# Altium PCB PCB_Display_2021-08-04.pcbdoc
Units mil, origin at the board's own origin, x right, y up, seen from the top; angles counter-clockwise.
Board outline 4077.43 x 3148.62 mil, 2 copper layers (Top Layer, Bottom Layer); 20 components, 19 nets, 73 pads, 2 vias.
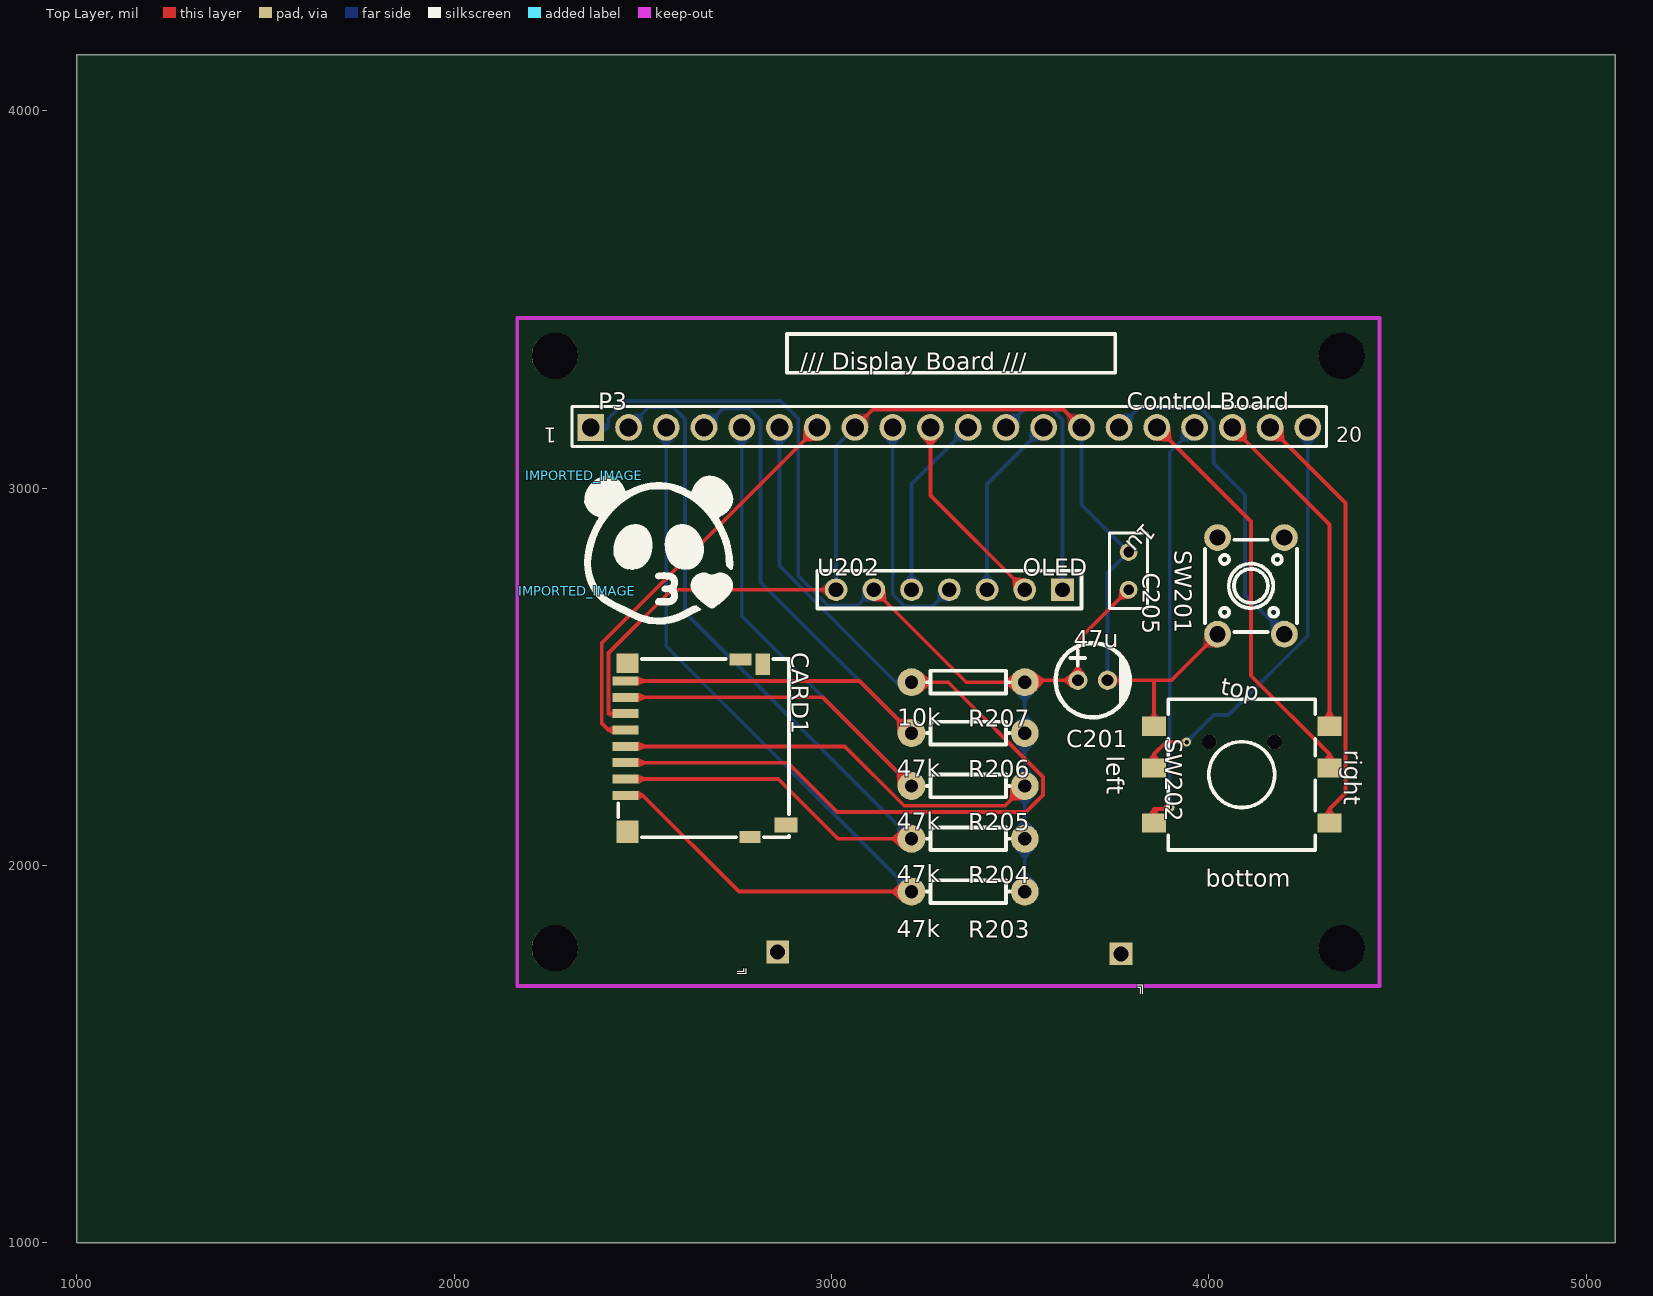
[diagram p0: Top Layer view]
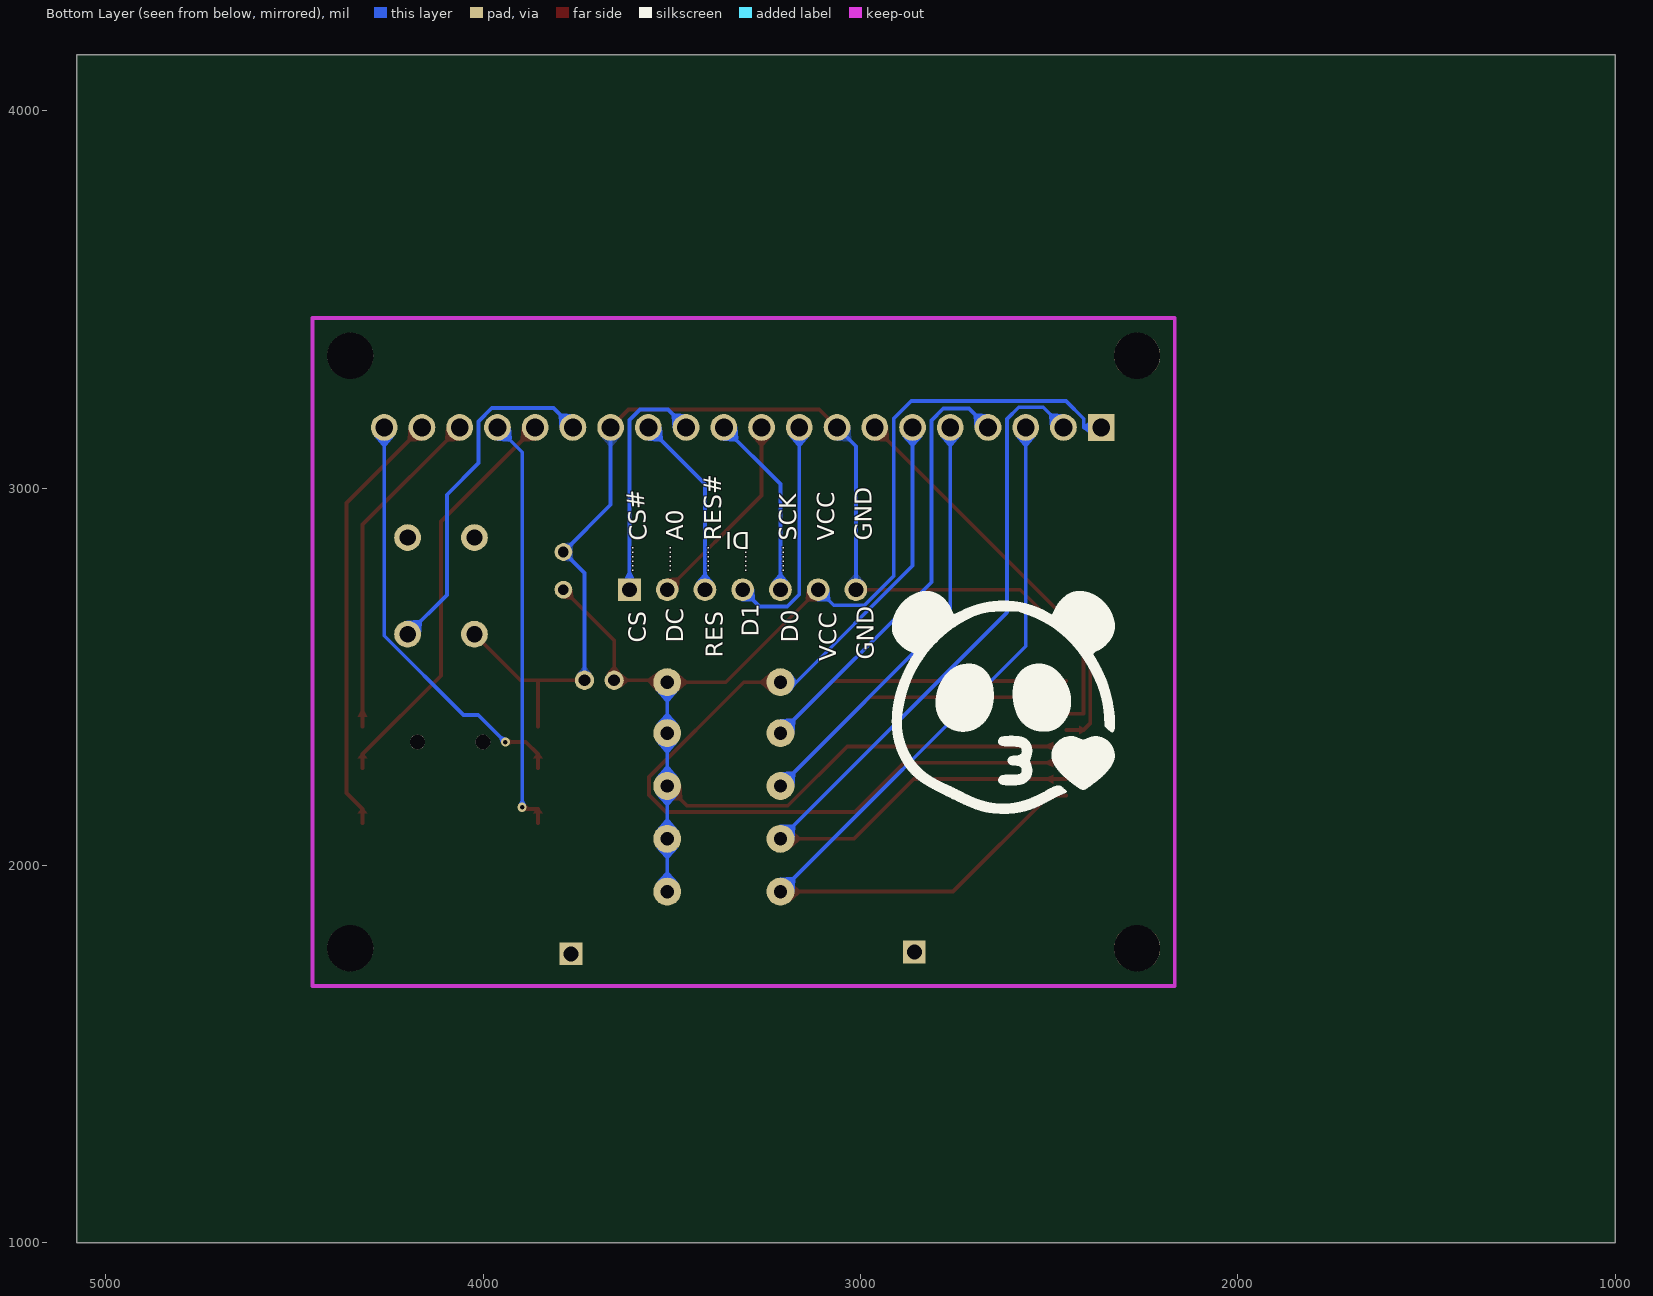
[diagram p1: Bottom Layer view, seen from below]

## Layer stack, top to bottom
Top Layer: signal copper (thickness not stored)
Dielectric: dielectric 12.6, FR-4, Dk 4.8
Bottom Layer: signal copper (thickness not stored)

## Board outline
5077.43,1000 1000,1000 1000,4148.62 5077.43,4148.62

## Components (designator, comment, footprint, x,y, rotation, side; value= is the part's Value field where it differs from the comment)
C201 "47u" CAP-TH_BD5.0-P2.00-D0.8-FD 3692.43,2490.72 r0 top
C205 "1u" RAD-0.1 3787.43,2780.72 r270 top
CARD1 "DM3D-SF" TF-SMD_DM3D-SF 2667.43,2310.72 r270 top
IMPORTED_IMAGE "IMPORTED_IMAGE" IMPORTED_IMAGE 2326.3,2726.86 r0 top
IMPORTED_IMAGE "IMPORTED_IMAGE" IMPORTED_IMAGE 2345.35,3032.15 r0 top
P3 "Control Board" HDR-TH_20P-P2.54-V 3312.43,3160.72 r0 top
R203 "47k" R_AXIAL-0.3 3362.43,1930.72 r180 top
R204 "47k" R_AXIAL-0.3 3362.43,2070.72 r180 top
R205 "47k" R_AXIAL-0.3 3362.43,2210.72 r180 top
R206 "47k" R_AXIAL-0.3 3362.43,2350.72 r180 top
R207 "10k" R_AXIAL-0.3 3362.43,2485.72 r180 top
SW201 "K2-1839SP-C4SW-02" KEY-TH_4P-L6.2-W6.2-P4.50-LS6.5 4111.83,2740.92 r90 top
SW202 "TSX103G901-250" SW-SMD_TSX103G901-250 4087.43,2240.72 r0 top
U202 "OLED" 7P 3312.43,2730.72 r90 top
? "" ? 3309.93,3548.67 r0 top
? "" ? 1932.21,3305.7 r0 top
? "" ? 2143.09,2615.72 r0 top
? "" ? 2934.93,2118.22 r0 top
? "" ? 2640.62,2252.17 r0 top
? "" ? 3689.93,2116.36 r0 top

## Footprints (in the part's own frame and the unit in brackets; to place one, negate y for a bottom-side part, rotate by r counter-clockwise, add the part's x,y. Pads: shape width x height; smd on the part's side, far side on the other; paste and mask are expansions set on the pad)
7P [mil]
  round 60 hole 39.37: 1(0,300) 2(0,200) 3(0,100) 4(0,0) 5(0,-100) 6(0,-200)
  rect 60x60 hole 39.37: 7(0,-300)
  silkscreen extent -50,-350 50,350
CAP-TH_BD5.0-P2.00-D0.8-FD [mm]
  round 1.3 hole 0.8: 1(-1,0) 2(1,0)
  silkscreen extent -2.5,-2.5 2.5,2.5
HDR-TH_20P-P2.54-V [mm]
  rect 1.8x1.8 hole 1.2: 1(-24.13,0)
  round 1.8 hole 1.2: 2(-21.59,0) 3(-19.05,0) 4(-16.51,0) 5(-13.97,0) 6(-11.43,0) 7(-8.89,0) 8(-6.35,0) 9(-3.81,0) 10(-1.27,0) 11(1.27,0) 12(3.81,0) 13(6.35,0) 14(8.89,0) 15(11.43,0) 16(13.97,0) 17(16.51,0) 18(19.05,0) 19(21.59,0) 20(24.13,0)
  silkscreen extent -25.4,-1.27 25.4,1.4
IMPORTED_IMAGE [mil]
KEY-TH_4P-L6.2-W6.2-P4.50-LS6.5 [mm]
  round 1.8 hole 1.1: 1(-3.251,2.25) 2(3.251,2.25) 3(-3.251,-2.25) 4(3.251,-2.25)
  silkscreen extent -3.1,-3.1 3.1,3.1
R_AXIAL-0.3 [mil]
  round 74 hole 35.4: 1(-150,0) 2(150,0)
  silkscreen extent -110,-30 110,30
RAD-0.1 [mil]
  round 47 hole 28: 1(-50,0) 2(50,0)
  silkscreen extent -100,-50 100,50
SW-SMD_TSX103G901-250 [mm]
  rect 1.6x1.3 smd: 1(-5.9,3.25) 2(-5.9,0.45) 3(-5.9,-3.25) 4(5.9,3.25) 5(5.9,0.45) 6(5.9,-3.25)
  round 1 hole 1 unplated: ""(-2.2,2.2) ""(2.2,2.2)
  silkscreen extent -4.95,-5.08 4.95,5.08
TF-SMD_DM3D-SF [mm]
  rect 0.6x1.75 smd: 1(3.175,-5.4) 2(2.075,-5.4) 3(0.975,-5.4) 4(-0.125,-5.4) 5(-1.225,-5.4) 6(-2.325,-5.4) 7(-3.425,-5.4) 8(-4.525,-5.4)
  rect 1.45x1 smd: 9(-5.65,3.825)
  rect 1x1.55 smd: 10(5.175,5.4)
  rect 0.8x1.5 smd: 11(-5.975,2.325)
  rect 0.8x1.4 smd: 12(5.975,2.975)
  rect 1.5x1.5 smd: 13(5.625,-5.275)
  rect 1.3x1.5 smd: 14(-5.725,-5.275)
  silkscreen extent -6,-5.9 6,5.6
? [mil]

## Free pads (board coordinates)
  rect 60x60 hole 39.37: 1(2857.43,1770.72) 2(3767.43,1765.72)
  round 122.05 hole 122.05 unplated: ""(2267.43,1780.72) ""(2267.43,3350.72) ""(4352.43,1780.72) ""(4352.43,3350.72)

## Via types
v1: diameter 24.02, hole 12.01, Top Layer to Bottom Layer, 2 vias

## Nets (pads, with @x,y where several pads share a name; then routed paths per layer and width w, separated by ;. In a path a pad name is that pad's centre, name@x,y a point inside that pad or via, vN(x,y) a via of type N, cw(c..) or ccw(c..) an arc to the next point about the centre after c; other vN are vias at no path point)
A0: P3.10 U202.6 | length 533.6
  Top Layer w10: P3.10 3262.43,2980.72 U202.6
BOTTOM: P3.19 SW202.6 | length 1148.3
  Top Layer w10: P3.19 4362.29,2960.86 4362.29,2192.01 4319.71,2149.43 ; SW202.6 4319.73,2149.42
CENTER: P3.17 SW202.3 | length 1113.8
  Top Layer w10: SW202.3 3855.13,2149.42 ; 3855.15,2149.43 3891.81,2149.43 v1(3896.71,2154.33)
  Bottom Layer w10: v1(3896.71,2154.33) 3896.71,3095 P3.17
CS#: P3.12 U202.7 | length 631
  Bottom Layer w10: P3.12 3510.13,3208.42 3584.33,3208.42 3612.43,3180.32 U202.7
DI: P3.9 U202.4 | length 624.3
  Bottom Layer w10: P3.9 3162.43,2718.16 3194.49,2686.1 3267.81,2686.1 U202.4
GND: C201.2 C205.1 CARD1.6 P3.8 P3.14 SW201.1 SW202.1 U202.1 | length 3177.6
  Top Layer w10: 2409.32,2402.26 2409.32,2562.84 2577.2,2730.72 U202.1 ; 2409.33,2402.22 CARD1.6@2454.83,2402.22 ; P3.8 3109.78,3208.07 3615.08,3208.07 P3.14 ; C201.2 3855.15,2490.72 ; SW202.1@3855.13,2368.62 3855.13,2405.32 ; 3855.15,2405.33 3855.15,2490.72 ; SW201.1 3901.03,2490.72 3855.15,2490.72
  Bottom Layer w10: U202.1 3012.43,3110.72 P3.8 ; P3.14 3662.43,2955.72 C205.1 3731.8,2775.09 C201.2
LEFT: P3.20 SW202.2 | length 1125.7
  Top Layer w10: SW202.2 3855.13,2295.12 3887.14,2327.09 v1(3941.43,2327.09)
  Bottom Layer w10: v1(3941.43,2327.09) 4013.26,2398.92 4052.37,2398.92 4262.43,2608.98 P3.20
P3_2: CARD1.2 P3.2 R204.2 | length 2369.2
  Top Layer w10: CARD1.2 2859.03,2229.02 3017.33,2070.72 R204.2
  Bottom Layer w10: P3.2 2516.1,3214.39 2581.06,3214.39 2612.43,3183.02 2612.43,2670.72 R204.2
P3_3: CARD1.1 P3.3 R203.2 | length 2362.4
  Top Layer w10: CARD1.1 2500.33,2185.72 2755.35,1930.72 R203.2
  Bottom Layer w10: P3.3 2562.43,2580.72 R203.2
P3_4: CARD1.8 P3.4 R206.2 | length 1992.9
  Top Layer w10: CARD1.8@2454.83,2488.82 3074.33,2488.82 R206.2
  Bottom Layer w10: P3.4 2712.6,3210.89 2780.84,3210.89 2812.43,3179.3 2812.43,2750.72 R206.2
P3_5: CARD1.7 P3.5 R205.2 | length 1991.3
  Top Layer w10: CARD1.7@2454.83,2445.52 2977.63,2445.52 R205.2
  Bottom Layer w10: P3.5 2762.43,2660.72 R205.2
P3_6: CARD1.3 P3.6 R207.2 | length 2523.3
  Top Layer w10: CARD1.3 2885.13,2272.32 3015.73,2141.72 3515.83,2141.72 3560.93,2186.82 3560.93,2234.22 3309.43,2485.72 R207.2
  Bottom Layer w10: P3.6 2862.43,2794.04 3170.75,2485.72 R207.2
P3_7: CARD1.5 P3.7 | length 1090.9
  Top Layer w10: 2409.32,2358.95 2391.79,2376.48 2391.79,2590.08 P3.7 ; 2409.33,2358.92 CARD1.5
POWER: P3.15 SW201.3 | length 927.6
  Bottom Layer w10: P3.15 3813.71,3212 3977.26,3212 4012.43,3176.83 4012.43,3066.46 4096.33,2982.56 4096.33,2717.02 SW201.3
RES#: P3.13 U202.5 | length 492.1
  Bottom Layer w10: U202.5 3412.43,3010.72 P3.13
RIGHT: P3.16 SW202.5 | length 1091.7
  Top Layer w10: P3.16 4111.84,2911.31 4111.84,2502.97 4319.71,2295.1 ; SW202.5 4319.73,2295.12
SCK: P3.11 U202.3 | length 492.1
  Bottom Layer w10: U202.3 3212.43,3010.72 P3.11
TOP: P3.18 SW202.4 | length 898.7
  Top Layer w10: P3.18 4319.73,2903.42 SW202.4@4319.73,2368.62
VCC: C201.1 C205.2 CARD1.4 P3.1 R203.1 R204.1 R205.1 R206.1 R207.1 U202.2 | length 3917.6
  Top Layer w10: CARD1.4 3035.53,2315.62 3192.93,2158.22 3459.93,2158.22 R205.1 ; U202.2 3357.43,2485.72 R207.1 3517.43,2490.72 C201.1 3653.06,2596.35 C205.2
  Bottom Layer w10: P3.1 2408.93,3160.72 2408.93,3183.97 2455.44,3230.48 2866.03,3230.48 2912.43,3184.08 2912.43,2766.8 2989.83,2689.4 3071.11,2689.4 U202.2 ; R203.1 R204.1 R205.1 R206.1 R207.1
pads on no net: CARD1.9 CARD1.10 CARD1.11 CARD1.12 CARD1.13 CARD1.14 SW201.2 SW201.4 SW202.

## Polygon pours and split planes (outlines as drawn)
GND on Bottom Layer (solid): 2167.43,3450.72 4577.43,3530.72 4452.43,1680.72 2167.43,1680.72 2167.43,1685.72
GND on Top Layer (solid): 2167.43,3450.72 4502.43,3480.72 4452.43,1680.72 2167.43,1680.72 2167.43,1685.72

## Other copper
Top Layer:
  region net VCC: 3636.13,2471.53 3636.13,2509.91 3618.22,2495.72 3618.22,2485.72
  region net VCC: 3672.25,2507.65 3633.86,2507.65 3648.06,2525.56 3658.06,2525.56
  region net VCC: 3763.97,2732.19 3788.9,2707.27 3768.34,2704.56 3761.27,2711.63
  region net BOTTOM: 4160.21,3125.36 4197.79,3162.94 4200.07,3130.14 4193,3123.07
  region net TOP: 4060.21,3125.36 4097.79,3162.94 4100.07,3130.14 4093,3123.07
  region net RIGHT: 3860.21,3125.36 3897.79,3162.94 3900.07,3130.14 3893,3123.07
  region net A0: 3289,3137.28 3235.85,3137.28 3257.43,3112.48 3267.43,3112.48
  region net P3_7: 2927.06,3162.94 2964.65,3125.36 2931.85,3123.07 2924.78,3130.14
  region net P3_3: 3187.95,1902.97 3187.95,1958.47 3162.05,1935.72 3162.05,1925.72
  region net P3_2: 3187.95,2042.97 3187.95,2098.47 3162.05,2075.72 3162.05,2065.72
  region net VCC: 3475.5,2213.04 3514.74,2173.79 3480.34,2171.57 3473.27,2178.64
  region net P3_5: 3175.5,2208.4 3214.74,2247.65 3180.34,2249.87 3173.27,2242.8
  region net P3_4: 3175.5,2348.4 3214.74,2387.65 3180.34,2389.87 3173.27,2382.8
  region net VCC: 3487.95,2457.97 3487.95,2513.47 3462.05,2490.72 3462.05,2480.72
  region net VCC: 3539.53,2460.54 3534.03,2515.76 3562.05,2495.72 3563.05,2485.72
  region net P3_6: 3236.9,2457.97 3236.9,2513.47 3262.8,2490.72 3262.8,2480.72
  region net A0: 3482.49,2728.84 3514.31,2760.66 3487.08,2763.14 3480.01,2756.06
  region net VCC: 3110.55,2700.78 3142.37,2732.6 3144.84,2705.37 3137.77,2698.3
  region net LEFT: 3933.48,2318.08 3933.48,2336.1 3925.08,2332.09 3925.08,2322.09
  region net CENTER: 3891.83,2143.36 3886.43,2160.54 3879.54,2154.43 3882.68,2144.43
  region net P3_3: 2489.28,2197.53 2489.28,2173.91 2500.35,2180.72 2500.35,2190.72
  region net P3_2: 2489.28,2240.84 2489.28,2217.22 2504.28,2224.03 2504.28,2234.03
  region net P3_6: 2489.28,2284.15 2489.28,2260.52 2504.28,2267.33 2504.28,2277.33
  region net VCC: 2489.28,2327.45 2489.28,2303.83 2504.28,2310.64 2504.28,2320.64
  region net P3_7: 2420.38,2347.14 2420.38,2370.76 2409.32,2363.95 2409.32,2353.95
  region net P3_5: 2489.28,2457.38 2489.28,2433.75 2504.28,2440.56 2504.28,2450.56
  region net P3_4: 2489.28,2500.68 2489.28,2477.06 2504.28,2483.87 2504.28,2493.87
  region net LEFT: 3842.65,2284.03 3867.65,2284.03 3860.15,2295.1 3850.15,2295.1
  region net CENTER: 3842.65,2138.36 3867.65,2138.36 3860.15,2149.43 3850.15,2149.43
  region net TOP: 4307.21,2394.26 4332.21,2394.26 4324.71,2409.26 4314.71,2409.26
  region net RIGHT: 4307.21,2284.03 4332.21,2284.03 4324.71,2295.1 4314.71,2295.1
  region net BOTTOM: 4307.21,2138.36 4332.21,2138.36 4324.71,2149.43 4314.71,2149.43
Bottom Layer:
  region net LEFT: 4289,3137.28 4235.85,3137.28 4257.43,3112.48 4267.43,3112.48
  region net CENTER: 3927.06,3162.94 3964.65,3125.36 3931.85,3123.07 3924.78,3130.14
  region net POWER: 3760.21,3196.08 3797.79,3158.5 3800.07,3191.3 3793,3198.37
  region net RES#: 3527.06,3162.94 3564.65,3125.36 3531.85,3123.07 3524.78,3130.14
  region net CS#: 3460.21,3196.08 3497.79,3158.5 3500.07,3191.3 3493,3198.37
  region net SCK: 3327.06,3162.94 3364.65,3125.36 3331.85,3123.07 3324.78,3130.14
  region net DI: 3189,3137.28 3135.85,3137.28 3157.43,3112.48 3167.43,3112.48
  region net P3_6: 2889,3137.28 2835.85,3137.28 2857.43,3112.48 2867.43,3112.48
  region net P3_5: 2789,3137.28 2735.85,3137.28 2757.43,3112.48 2767.43,3112.48
  region net P3_4: 2660.21,3196.08 2697.79,3158.5 2700.07,3191.3 2693,3198.37
  region net P3_3: 2589,3137.28 2535.85,3137.28 2557.43,3112.48 2567.43,3112.48
  region net P3_2: 2460.21,3196.08 2497.79,3158.5 2500.07,3191.3 2493,3198.37
  region net VCC: 3540.18,1955.19 3484.68,1955.19 3507.43,1981.09 3517.43,1981.09
  region net P3_3: 3175.5,1928.4 3214.74,1967.65 3180.34,1969.87 3173.27,1962.8
  region net VCC: 3540.18,2095.19 3484.68,2095.19 3507.43,2121.09 3517.43,2121.09
  region net VCC: 3540.18,2046.25 3484.68,2046.25 3507.43,2020.35 3517.43,2020.35
  region net P3_2: 3175.5,2068.4 3214.74,2107.65 3180.34,2109.87 3173.27,2102.8
  region net VCC: 3540.18,2235.19 3484.68,2235.19 3507.43,2261.09 3517.43,2261.09
  region net VCC: 3540.18,2186.25 3484.68,2186.25 3507.43,2160.35 3517.43,2160.35
  region net P3_5: 3175.5,2208.4 3214.74,2247.65 3180.34,2249.87 3173.27,2242.8
  region net VCC: 3540.18,2375.19 3484.68,2375.19 3507.43,2401.09 3517.43,2401.09
  region net VCC: 3540.18,2326.25 3484.68,2326.25 3507.43,2300.35 3517.43,2300.35
  region net P3_4: 3175.5,2348.4 3214.74,2387.65 3180.34,2389.87 3173.27,2382.8
  region net VCC: 3540.18,2461.25 3484.68,2461.25 3507.43,2435.35 3517.43,2435.35
  region net P3_6: 3187.95,2457.97 3187.95,2513.47 3170.75,2490.72 3170.75,2480.72
  region net POWER: 4165.06,2610.7 4202.65,2648.28 4169.85,2650.57 4162.78,2643.5
  region net RES#: 3434.93,2750.56 3389.93,2750.56 3407.43,2771.56 3417.43,2771.56
  region net DI: 3282.49,2732.6 3314.31,2700.78 3287.08,2698.3 3280.01,2705.37
  region net SCK: 3234.93,2750.56 3189.93,2750.56 3207.43,2771.56 3217.43,2771.56
  region net VCC: 3082.49,2732.6 3114.31,2700.78 3087.08,2698.3 3080.01,2705.37
  region net LEFT: 3953.41,2326.34 3940.67,2339.07 3949.45,2342.18 3956.52,2335.11
  region net CENTER: 3887.7,2162.27 3905.72,2162.27 3901.71,2170.68 3891.71,2170.68
  region net VCC: 2397.86,3173.22 2397.86,3148.22 2408.93,3155.72 2408.93,3165.72
  region net CS#: 3599.93,2760.72 3624.93,2760.72 3617.43,2775.72 3607.43,2775.72

## Silkscreen, mask and mechanical layers (free items; w line width, h text height)
Top Overlay:
  lines w10: 2882.43,3305.72 3752.43,3305.72 3752.43,3408.22 2882.43,3408.22 2882.43,3305.72
  text "/// Display Board ///" at 2917.43,3313.22 h45
  text "Control Board" at 3782.43,3208.22 h45
  text "1" at 2272.43,3160.41 h39.37 r180
  text "20" at 4337.43,3121.03 h39.37
  text "top" at 4028.52,2453.56 h45 r350
  text "right" at 4359.93,2306.11 h45 r269
  text "left" at 3729.93,2290.72 h45 r270
  text "bottom" at 3992.43,1943.22 h45
  text "╚" at 2792.43,1705.72 h45 r90
  text "╚" at 3832.43,1700.72 h45 r180
Bottom Overlay:
  text "DI" at 3292.43,2883.22 h45 r180
  text "CS#" at 3564.98,2862.29 h45 r266
  text "GND" at 2969.93,2860.72 h45 r270
  text "VCC" at 3069.93,2860.72 h45 r270
  text "SCK" at 3169.93,2860.72 h45 r270
  text "RES#" at 3369.93,2860.72 h45 r270
  text "A0" at 3469.93,2860.72 h45 r270
  text "……" at 3192.43,2775.72 h45 r270
  text "……" at 3292.43,2775.72 h45 r270
  text "……" at 3392.43,2775.72 h45 r270
  text "……" at 3492.43,2775.72 h45 r270
  text "……" at 3592.43,2775.72 h45 r270
  text "D1" at 3269.93,2605.72 h45 r270
  text "D0" at 3164.93,2590.72 h45 r270
  text "DC" at 3469.93,2590.72 h45 r270
  text "CS" at 3569.93,2590.72 h45 r270
  text "RES" at 3364.93,2550.72 h45 r270
  text "GND" at 2964.93,2545.72 h45 r270
  text "VCC" at 3064.93,2540.72 h45 r270